# Altium PCB PCB1.PcbDoc
Units mm, origin at the board's own origin, x right, y up, seen from the top; angles counter-clockwise.
Board outline 40 x 25 mm, 2 copper layers (Top Layer, Bottom Layer); 52 components, 35 nets, 215 pads, 0 vias.
Unrouted connection lines stored in the file: 137.
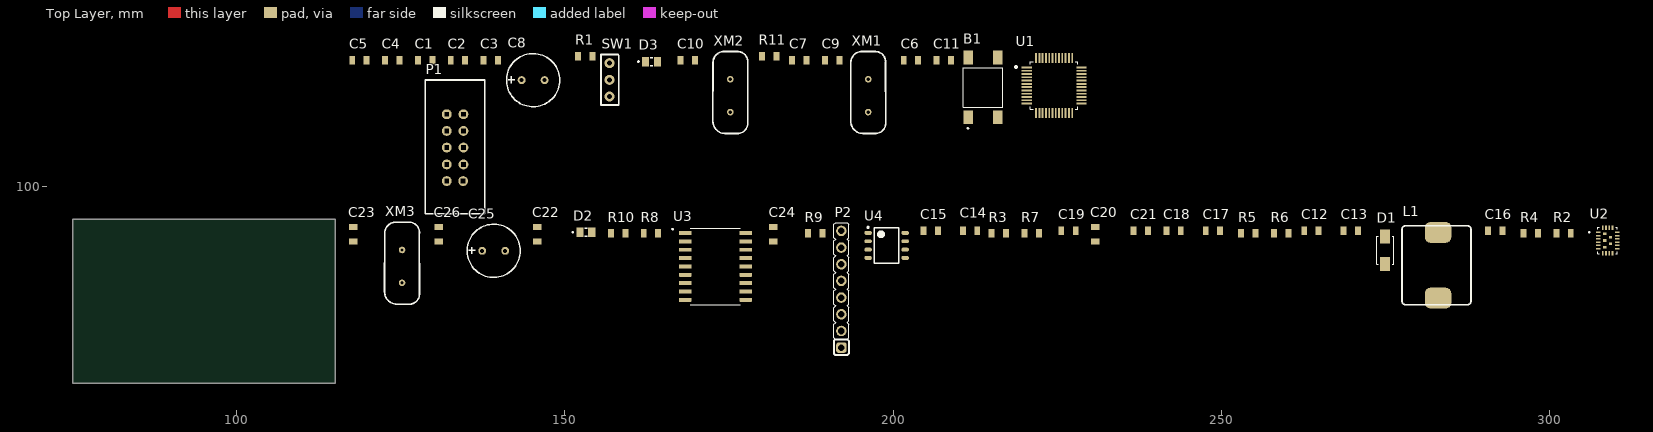
[diagram p0: Top Layer view]
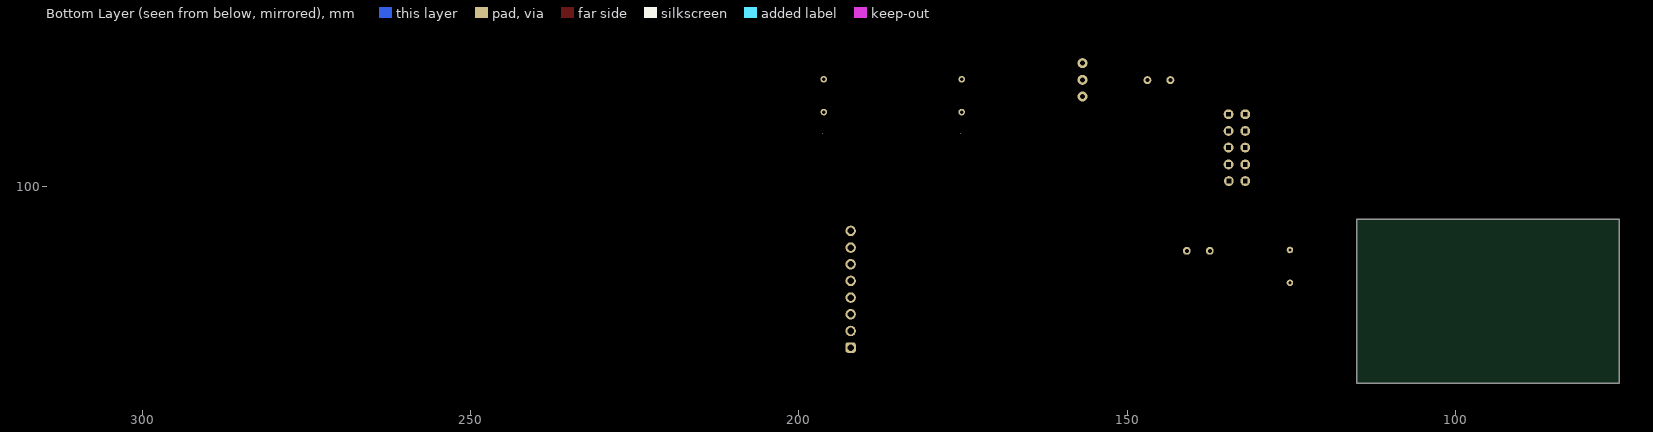
[diagram p1: Bottom Layer view, seen from below]

## Layer stack, top to bottom
Top Solder: solder mask 0.0102, Solder Resist, Dk 3.5
Top Layer: signal copper 0.0356
Dielectric 1: dielectric 0.32, FR-4, Dk 4.8
Bottom Layer: signal copper 0.0356
Bottom Solder: solder mask 0.0102, Solder Resist, Dk 3.5

## Board outline
75,70 115,70 115,95 75,95

## Design rules (kind name [scope] priority, off if disabled: settings)
Clearance [All] p1: gap=0.254 ignorepadtopadclearanceinfootprint=FALSE
DiffPairsRouting [All] p1: maxlimit=0.254 minlimit=0.254 mostfreqgap=0.254 toplayer_minwidth=0.381 toplayer_maxwidth=0.381 toplayer_prefwidth=0.381 bottomlayer_minwidth=0.381 bottomlayer_maxwidth=0.381 bottomlayer_prefwidth=0.381 maxuncoupledlength=12.7
PolygonConnect [All] p1: connectstyle=Relief reliefconductorwidth=0.254 reliefentries=4 polygonreliefangle="90 Angle" airgapwidth=0.254
RoutingVias [All] p1: holewidth=0.711 width=1.27 viastyle="Through Hole" minholewidth=0.711 minwidth=1.27 maxholewidth=0.711 maxwidth=1.27
SolderMaskExpansion [All] p1: expansion=0.102 istentingtop=FALSE
SupplyNets "Schematic Supply Nets_3" [InNet('3.3')] p1: voltage=0.000
SupplyNets "Schematic Supply Nets_2" [InNet('+12')] p2: voltage=0.000
SupplyNets "Schematic Supply Nets_1" [InNet('VCC')] p3: voltage=0.000
SupplyNets "Schematic Supply Nets" [InNet('GND')] p4: voltage=0.000
Width [All] p1: maxlimit=0.254 minlimit=0.254 preferedwidth=0.254
29 further rules are at their usual default settings.

## Classes and differential pairs
component class U_STM32: B1 C1 C2 C3 C4 C5 C6 C7 C8 C9 C10 C11 D3 P1 R1 R11 SW1 U1 XM1 XM2
component class U_Periphery: C12 C13 C15 C16 C17 C18 C19 C20 C21 C22 C23 C24 C25 C26 D1 D2 J1 J2 J3 L1 P2 R2 R3 R4 R5 R6 R7 R8 R9 R10 U2 U3 U4 XM3 С14
differential pair CAN: +CAN_P -CAN_N

## Components (designator, comment, footprint, x,y, rotation, side; value= is the part's Value field where it differs from the comment)
B1 "Knopka" knopka 214,115 r90 top
C1 "100nF" C0805 129,119 r0 top
C2 "100nF" C0805 134,119 r0 top
C3 "100nF" C0805 139,119 r0 top
C4 "10nF" C0805 124,119 r0 top
C5 "1uF" C0805 119,119 r0 top
C6 "10pF" C0805 203,119 r0 top
C7 "10pF" C0805 186,119 r0 top
C8 "4.7uF" "CAP_3.5 (8x12мм)" 145,116 r0 top
C9 "20pF" C0805 191,119 r0 top
C10 "20pF" C0805 169,119 r0 top
C11 "100nF" C0805 208,119 r0 top
C12 "10uF" C0805 264,93 r0 top
C13 "1uF" C0805 270,93 r0 top
C15 "1uF" C0805 206,93 r0 top
C16 "104uF" C0805 292,93 r0 top
C17 "390pF" C0805 249,93 r0 top
C18 "C0805" C0805 243,93 r0 top
C19 "100uF" C0805 227,93 r0 top
C20 "22nF" C0805 231,93 r90 top
C21 "104uF" C0805 238,93 r0 top
C22 "22pF" C0805 146,93 r90 top
C23 "22pF" C0805 118,93 r90 top
C24 "0.1uF" C0805 182,93 r90 top
C25 "10uF" "CAP_3.5 (8x12мм)" 139,90 r0 top
C26 "0.1uF" C0805 131,93 r90 top
D1 "SMAJ36CA" SMAJ36CA 270,90 r90 top
D2 "RED" LED0805 153,93 r0 top
D3 "Green" LED0805 163,119 r0 top
L1 "10uH" "Inductor 10uH 8A" 288,82 r90 top
P1 "SWD 10pin" "SWD 10 pin" 132,100.82 r90 top
P2 "PLS8" PLS8 192,82 r90 top
R1 "100" R0805 153,120 r0 top
R2 "500к" R0805 302,93 r0 top
R3 "100k" R0805 216,93 r0 top
R4 "4.7k" R0805 297,93 r0 top
R5 "845k" R0805 254,93 r0 top
R6 "24.3k" R0805 259,93 r0 top
R7 "7.68k" R0805 221,93 r0 top
R8 "10k" R0805 163,93 r0 top
R9 "120k" R0805 188,93 r0 top
R10 "1k" R0805 158,93 r0 top
R11 "1k" R0805 181,120 r0 top
SW1 "SW1" PLS3 157,115 r90 top
U1 "STM32F030C8T6" STM32F030C8T6 224,115 r0 top
U2 "MP9447GL-Z" MP9447GL-Z 309,92 r0 top
U3 "MCP2515" MCP2515 174,90 r0 top
U4 "SN65HVD230DR" SN65HVD230DR 199,91 r0 top
XM1 "32KHz" Resonator 196,114 r90 top
XM2 "8MHz" Resonator 175,114 r90 top
XM3 "8MHz" Resonator 125,88 r90 top
С14 "33nF" C0805 212,93 r0 top

## Footprints (in the part's own frame and the unit in brackets; to place one, negate y for a bottom-side part, rotate by r counter-clockwise, add the part's x,y. Pads: shape width x height; smd on the part's side, far side on the other; paste and mask are expansions set on the pad)
C0805 [mm]
  rect 0.9x1.3 smd: 1(-1.4,0.25) 2(0.8,0.25)
  body extent -1.4,-0.47 0.8,0.98, height 0.82
"CAP_3.5 (8x12мм)" [mm]
  round 1.2 hole 0.6: 1(-1.6,0.2) 2(1.9,0.2)
  silkscreen extent -3.9,-3.85 4.2,4.25, body extent -3.86,-3.79 4.14,4.21, height 12.3
"Inductor 10uH 8A" [mm]
  rrect50% 3.15x4 smd: 1(1,5) 2(11,5)
  silkscreen extent 0,0 12,10.5, body extent 0.69,0.28 11.31,10.5, height 3.78
knopka [mm]
  rect 2.1x1.4 smd: 1(-4.446,-1.926) 1(-4.446,2.574) 2(4.654,-1.926) 2(4.654,2.574)
  silkscreen extent -6.25,-2.68 3.1,3.32, body extent -4.9,-2.68 5.1,3.32, height 4.59
LED0805 [mm]
  rect 1.1x1.45 smd: A(1.091,0.016) C(-0.709,0.016)
  silkscreen extent -1.91,-0.58 0.39,0.62, body extent -0.81,-0.61 1.19,0.64, height 0.7
MCP2515 [mm]
  rrect25% 1.91x0.6 smd: 1(-5.687,2.897) 2(-5.687,1.627) 3(-5.687,0.357) 4(-5.687,-0.913) 5(-5.687,-2.183) 6(-5.687,-3.453) 7(-5.687,-4.723) 8(-5.687,-5.993) 9(-5.687,-7.263) 10(3.533,-7.263) 11(3.533,-5.993) 12(3.533,-4.723) 13(3.533,-3.453) 14(3.533,-2.183) 15(3.533,-0.913) 16(3.533,0.357) 17(3.533,1.627) 18(3.533,2.897)
  silkscreen extent -7.7,-8.01 2.72,3.64, body extent -6.23,-7.96 4.07,3.59, height 2.65
MP9447GL-Z [mm]
  rect 0.7x0.25 smd paste+0 mask+0.102: 1(-1.632,1.02) 2(-1.632,0.52) 3(-1.632,0.02) 4(-1.632,-0.48) 5(-1.632,-0.98) 6(-1.632,-1.48) 11(1.268,-1.48) 12(1.268,-0.98) 13(1.268,-0.48) 14(1.268,0.02) 15(1.268,0.52) 16(1.268,1.02)
  rect 0.25x0.7 smd paste+0 mask+0.102: 7(-0.932,-2.18) 8(-0.432,-2.18) 9(0.068,-2.18) 10(0.568,-2.18) 17(0.568,1.72) 18(0.068,1.72) 19(-0.432,1.72) 20(-0.932,1.72)
  rrect5% 0.5x0.4 smd paste+0 mask+0.102: 21(-0.632,0.77) 22(-0.632,-0.23) 23(-0.632,-1.23) 24(0.268,0.28) 25(0.268,-0.74)
  silkscreen extent -3.08,-2.23 1.32,1.77, body extent -1.68,-2.23 1.32,1.77, height 1
PLS3 [mil]
  round 60 hole 30: 1(-51.18,7.87) 2(48.82,7.87) 3(148.82,7.87)
  silkscreen extent -102,-47 201,59
PLS8 [mm]
  rrect50% 1.6x1.6 hole 1: 1(-6.55,-0.1)
  round 1.6 hole 1: 2(-4.01,-0.1) 3(-1.47,-0.1) 4(1.07,-0.1) 5(3.61,-0.1) 6(6.15,-0.1) 7(8.69,-0.1) 8(11.23,-0.1)
  silkscreen extent -7.69,-1.24 12.5,1.04, body extent -7.86,-1.36 12.46,1.18, height 9.7
R0805 [mm]
  rect 0.9x1.3 smd: 1(-1,-0.15) 2(1.2,-0.15)
  body extent -0.89,-0.77 1.11,0.49, height 0.47
Resonator [mm]
  round 1 hole 0.5: 1(-2.676,-0.187) 2(2.327,-0.187)
  rect 0.025x0.025 all layers, no hole: йй2(-5.927,-0.413)
  silkscreen extent -5.93,-2.85 6.56,2.47
SMAJ36CA [mm]
  rect 2.12x1.5 smd: 1(-1.829,-4.929) 2(2.401,-4.929)
  silkscreen extent -1.88,-6.21 2.45,-3.65, body extent -2.14,-6.06 3,-3.5, height 2.5
SN65HVD230DR [mm]
  oval 1.15x0.6 smd: 1(-2.831,1.922) 2(-2.831,0.652) 3(-2.831,-0.618) 4(-2.831,-1.888) 5(2.819,-1.888) 6(2.819,-0.618) 7(2.819,0.652) 8(2.819,1.922)
  silkscreen extent -2.96,-2.68 1.84,2.9, body extent -2.26,-2.68 2.24,2.72, height 1.8
STM32F030C8T6 [mm]
  rect 1.56x0.28 smd: 1(-3.672,3.131) 2(-3.672,2.631) 3(-3.672,2.131) 4(-3.672,1.631) 5(-3.672,1.131) 6(-3.672,0.631) 7(-3.672,0.131) 8(-3.672,-0.369) 9(-3.672,-0.869) 10(-3.672,-1.369) 11(-3.672,-1.869) 12(-3.672,-2.369) 25(4.688,-2.369) 26(4.688,-1.869) 27(4.688,-1.369) 28(4.688,-0.869) 29(4.688,-0.369) 30(4.688,0.131) 31(4.688,0.631) 32(4.688,1.131) 33(4.688,1.631) 34(4.688,2.131) 35(4.688,2.631) 36(4.688,3.131)
  rect 0.28x1.56 smd: 13(-2.242,-3.799) 14(-1.742,-3.799) 15(-1.242,-3.799) 16(-0.742,-3.799) 17(-0.242,-3.799) 18(0.258,-3.799) 19(0.758,-3.799) 20(1.258,-3.799) 21(1.758,-3.799) 22(2.258,-3.799) 23(2.758,-3.799) 24(3.258,-3.799) 37(3.258,4.561) 38(2.758,4.561) 39(2.258,4.561) 40(1.758,4.561) 41(1.258,4.561) 42(0.758,4.561) 43(0.258,4.561) 44(-0.242,4.561) 45(-0.742,4.561) 46(-1.242,4.561) 47(-1.742,4.561) 48(-2.242,4.561)
  silkscreen extent -5.44,-3.22 4.11,3.98, body extent -3.99,-4.12 5.01,4.88, height 1.6
"SWD 10 pin" [mm]
  round 1.5 hole 0.68 square: 1(0,0) 2(2.54,0) 3(5.1,0) 4(7.64,0) 5(10.18,0) 6(0,-2.5) 7(2.54,-2.54) 8(5.1,-2.54) 9(7.64,-2.54) 10(10.18,-2.54)
  silkscreen extent -5,-5.8 15.4,3.3

## Part data
B1: "SMD"
C1 C2 C3 C4 C5 C6 C7 C9 C10 C11 C12 C13 C15 C16 C17 C19 C20 C21 C22 C23 C24 C26 С14: library part C0805, "Керамический конденсатор. 1uF,10uF,106uF,33pF,100uF"
C8 C25: library part C_3.5, "Электролит конденсатор (8x12мм)"
C18: "Керамический конденсатор. 1uF,10uF,106uF,33pF,100uF"
D1: "TVS-диод (Transient Voltage Suppressor)Рабочее напряжение (stand-off): 36 В / Пробой: ~40–44 В / Ограничение (clamping): ~58 В / Импульсная мощность: 400 Вт / Тип: двунаправленный (CA)"
D2 D3: library part Led, "SMD 0805"
L1: library part "Inductor SMD", "Катушка индуктивности SMD экранированная 10мкГн +20% 6,8A 36,5мОм 4040 лента на катушке. name-IHLP4040DZER100M01"
R1 R2 R3 R4 R5 R6 R7 R8 R9 R10 R11: library part R0805, "SMD"
SW1: library part PLS3, "для джампера"
U2: "Микросхема понижающего импульсного стабилизатора напряжения (Buck Switching Regulator IC), регулировка положительного напряжения 0,8 В, 1 выход, 5 А, 20-VFQFN, открытая контактная площадка."
U3: "MCP2515-I/SO"
U4: "трансивер, 1Мбит/с, 3-3,6ВDC, SO8"
XM1 XM2 XM3: library part Resonator

## Nets (pads, with @x,y where several pads share a name; then routed paths per layer and width w, separated by ;. In a path a pad name is that pad's centre, name@x,y a point inside that pad or via, vN(x,y) a via of type N, cw(c..) or ccw(c..) an arc to the next point about the centre after c; other vN are vias at no path point)
3.3: C1.2 C2.2 C3.2 C8.1 P1.7 P1.8 R1.2 R11.2 SW1.1 U1.1 U1.9 U1.24 U1.48
+12: C12.2 C13.2 D1.2 R2.1 U2.8 U2.19 U2.21 U2.22 U2.23
BOOT0: SW1.2 U1.44
CAN_N: U4.6
CAN_P: R9.1 U4.7
CS: P2.3 U1.15 U3.16
GND: B1.1 C1.1 C2.1 C3.1 C4.1 C5.1 C6.1 C7.1 C8.2 C9.2 C10.2 C11.1 C12.1 C13.1 C15.1 C19.1 C20.1 C21.1 C22.1 C23.1 C24.1 C25.2 C26.1 D1.1 D2.C D3.C P1.3 P1.4 P2.2 R3.1 R7.1 SW1.3 U1.8 U1.23 U1.47 U2.1 U2.11 U2.12 U2.13 U2.14 U2.15 U2.16 U3.9 U4.2 U4.8 С14.1
INT: P2.7 U1.19 U3.12
MISO: P2.4 U1.16 U3.15
MOSI: P2.5 U1.17 U3.14
NetC4_2: C4.2 C5.2 R1.1
NetC6_2: C6.2 U1.3 XM1.2
NetC7_2: C7.2 U1.4 XM1.1
NetC9_1: C9.1 U1.5 XM2.2
NetC10_1: C10.1 U1.6 XM2.1
NetC16_1: C16.1 L1.2 R5.1 U2.9 U2.10 U2.17 U2.18 U2.24 U2.25
NetC16_2: C16.2 R4.2
NetC17_1: C17.1 C18.1 R5.2 R6.1 R7.2 U2.3
NetC22_2: C22.2 U3.7 XM3.2
NetC23_2: C23.2 U3.8 XM3.1
NetD2_A: D2.A R10.2
NetD3_A: D3.A R11.1
NetJ1_2: R9.2
NetR2_2: R2.2 U2.5
NetR3_2: R3.2 U2.2
NetR4_1: R4.1 U2.7
NetR8_1: R8.1 U3.17
NetU2_4: U2.4 С14.2
NetU3_1: U3.1 U4.1
NetU3_2: U3.2 U4.4
RST: B1.2 C11.2 P1.1 U1.7
SCK: P2.6 U1.18 U3.13
SWCLK: P1.6 U1.37
SWDIO: P1.2 U1.34
VCC: C15.2 C17.2 C18.2 C19.2 C20.2 C21.2 C24.2 C25.1 C26.2 L1.1 P2.1 R6.2 R8.2 R10.1 U2.20 U3.18 U4.3
pads on no net: P1.5 P1.9 P1.10 P2.8 U1.2 U1.10 U1.11 U1.12 U1.13 U1.14 U1.20 U1.21 U1.22 U1.25 U1.26 U1.27 U1.28 U1.29 U1.30 U1.31 U1.32 U1.33 U1.35 U1.36 U1.38 U1.39 U1.40 U1.41 U1.42 U1.43 U1.45 U1.46 U2.6 U3.3 U3.4 U3.5 U3.6 U3.10 U3.11 U4.5 XM1.йй2 XM2.йй2 XM3.йй2

## Silkscreen, mask and mechanical layers (free items; w line width, h text height)
Mechanical 1:
  the board outline again, w0.254